# Altium PCB DBV6.PcbDoc
Units mil, origin at the board's own origin, x right, y up, seen from the top; angles counter-clockwise.
Board outline 430 x 330 mil, 2 copper layers (Top Layer, Bottom Layer); 3 components, 6 nets, 12 pads, 0 vias.
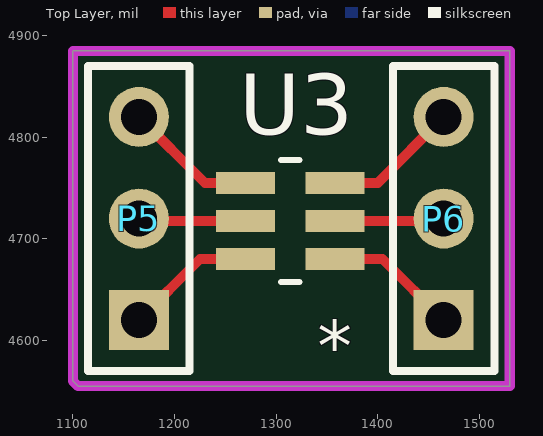
[diagram p0: Top Layer view]
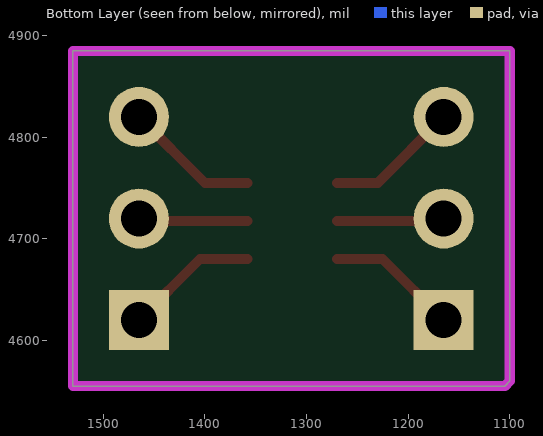
[diagram p1: Bottom Layer view, seen from below]

## Layer stack, top to bottom
Top Solder: solder mask 0.4, Solder Resist, Dk 3.5
Top Layer: signal copper 1.4
Dielectric 1: dielectric 12.6, FR-4, Dk 4.8
Bottom Layer: signal copper 1.4
Bottom Solder: solder mask 0.4, Solder Resist, Dk 3.5

## Board outline
1105,4555 1100,4560 1100,4885 1530,4885 1530,4555

## Design rules (kind name [scope] priority, off if disabled: settings)
Clearance [All] p1 off: gap=10 ignorepadtopadclearanceinfootprint=FALSE except(0: Arc-Hole Track-Hole SMDPad-Hole THPad-Hole Via-Hole Fill-Hole Poly-Hole Region-Hole Text-Hole)
ComponentClearance [All] p1 off: gap=10 collisioncheckmode=3 verticalgap=10 showdistances=FALSE
PolygonConnect [All] p1: connectstyle=Relief reliefconductorwidth=10 reliefentries=4 polygonreliefangle="90 Angle" airgapwidth=10
RoutingVias [All] p1: holewidth=28 width=50 viastyle="Through Hole" minholewidth=28 minwidth=50 maxholewidth=28 maxwidth=50
SolderMaskExpansion [All] p1: expansion=4
Width [All] p1: maxlimit=10 minlimit=10 preferedwidth=10
29 further rules are at their usual default settings.

## Components (designator, comment, footprint, x,y, rotation, side; value= is the part's Value field where it differs from the comment)
P5 "" HDR1X3 1165,4620 r90 top
P6 "" HDR1X3 1465,4620 r90 top
U3 "" DBV6 1314,4717.6 r180 top

## Footprints (in the part's own frame and the unit in brackets; to place one, negate y for a bottom-side part, rotate by r counter-clockwise, add the part's x,y. Pads: shape width x height; smd on the part's side, far side on the other; paste and mask are expansions set on the pad)
DBV6 [mil]
  rect 58x22 smd: 1(-44,37.4) 2(-44,0) 3(-44,-37.4) 4(44,-37.4) 5(44,0) 6(44,37.4)
  silkscreen extent -9,-60 9,60
HDR1X3 [mm] "Connector; Header; 3 Position"
  rect 1.5x1.5 hole 0.9: 1(0,0)
  round 1.5 hole 0.9: 2(2.54,0) 3(5.08,0)
  silkscreen extent -1.27,-1.27 6.35,1.27

## Nets (pads, with @x,y where several pads share a name; then routed paths per layer and width w, separated by ;. In a path a pad name is that pad's centre, name@x,y a point inside that pad or via, vN(x,y) a via of type N, cw(c..) or ccw(c..) an arc to the next point about the centre after c; other vN are vias at no path point)
U3-1: P6.1 U3.1 | length 131.9
  Top Layer w10: U3.1 1404.8,4680.2 P6.1
U3-2: P6.2 U3.2 | length 108
  Top Layer w10: U3.2 1462.6,4717.6 P6.2
U3-3: P6.3 U3.3 | length 133.9
  Top Layer w10: U3.3 1400,4755 P6.3
U3-4: P5.3 U3.4 | length 131.9
  Top Layer w10: P5.3 1230,4755 U3.4
U3-5: P5.2 U3.5 | length 106
  Top Layer w10: P5.2 1167.4,4717.6 U3.5
U3-6: P5.1 U3.6 | length 129.9
  Top Layer w10: P5.1 1225.2,4680.2 U3.6

## Keep-outs
Keep-Out Layer:
  the board outline again, w10

## Text inside footprints (layer, text, board x,y; h text height)
U3: Top Overlay "*" at 1375,4640 h50 r180